# Altium PCB SBM_BMS.PcbDoc
Units mm, origin at the board's own origin, x right, y up, seen from the top; angles counter-clockwise.
Board outline 191.45 x 73.02 mm, 2 copper layers (Top Layer, Bottom Layer); 66 components, 48 nets, 222 pads, 87 vias.
Unrouted connection lines stored in the file: 9.
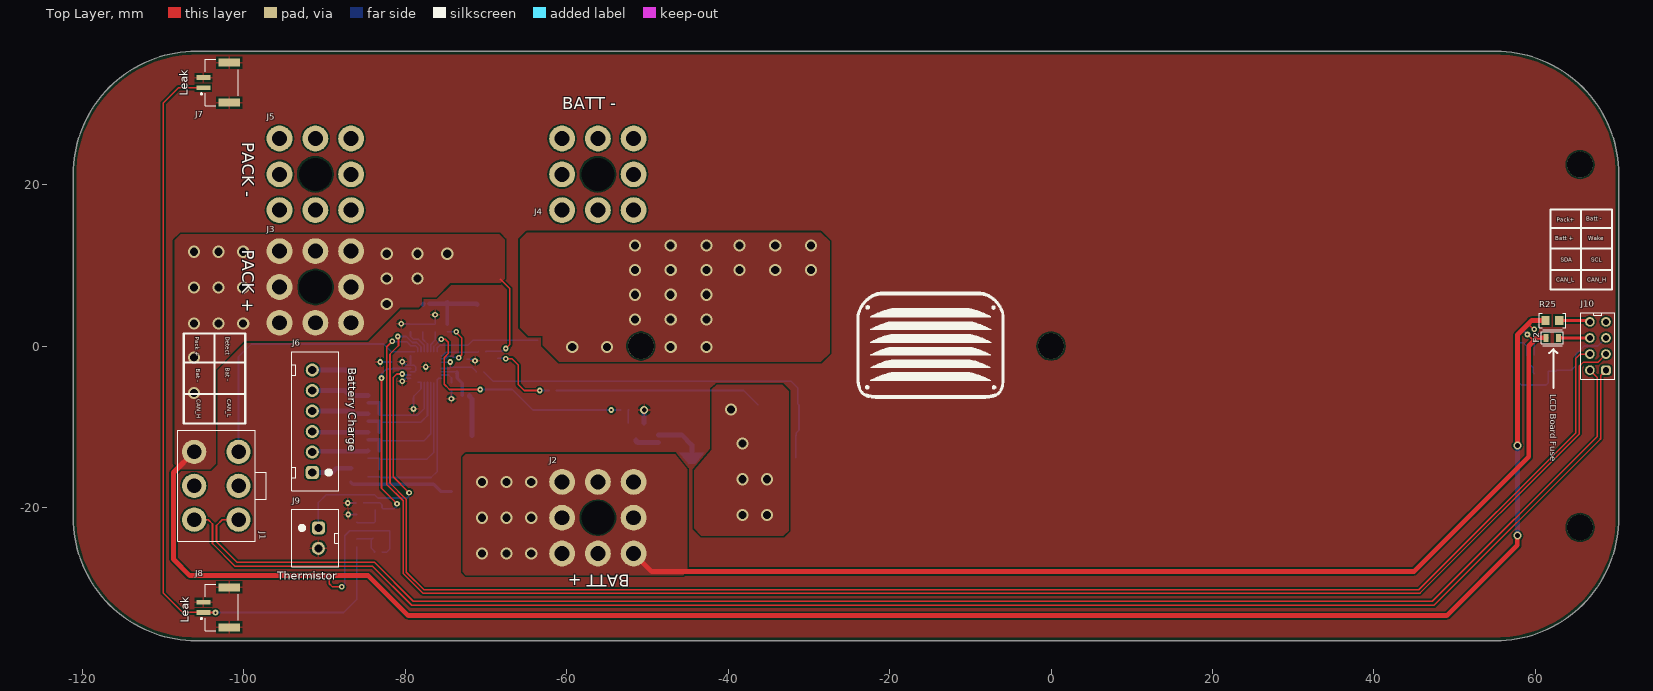
[diagram p0: Top Layer view]
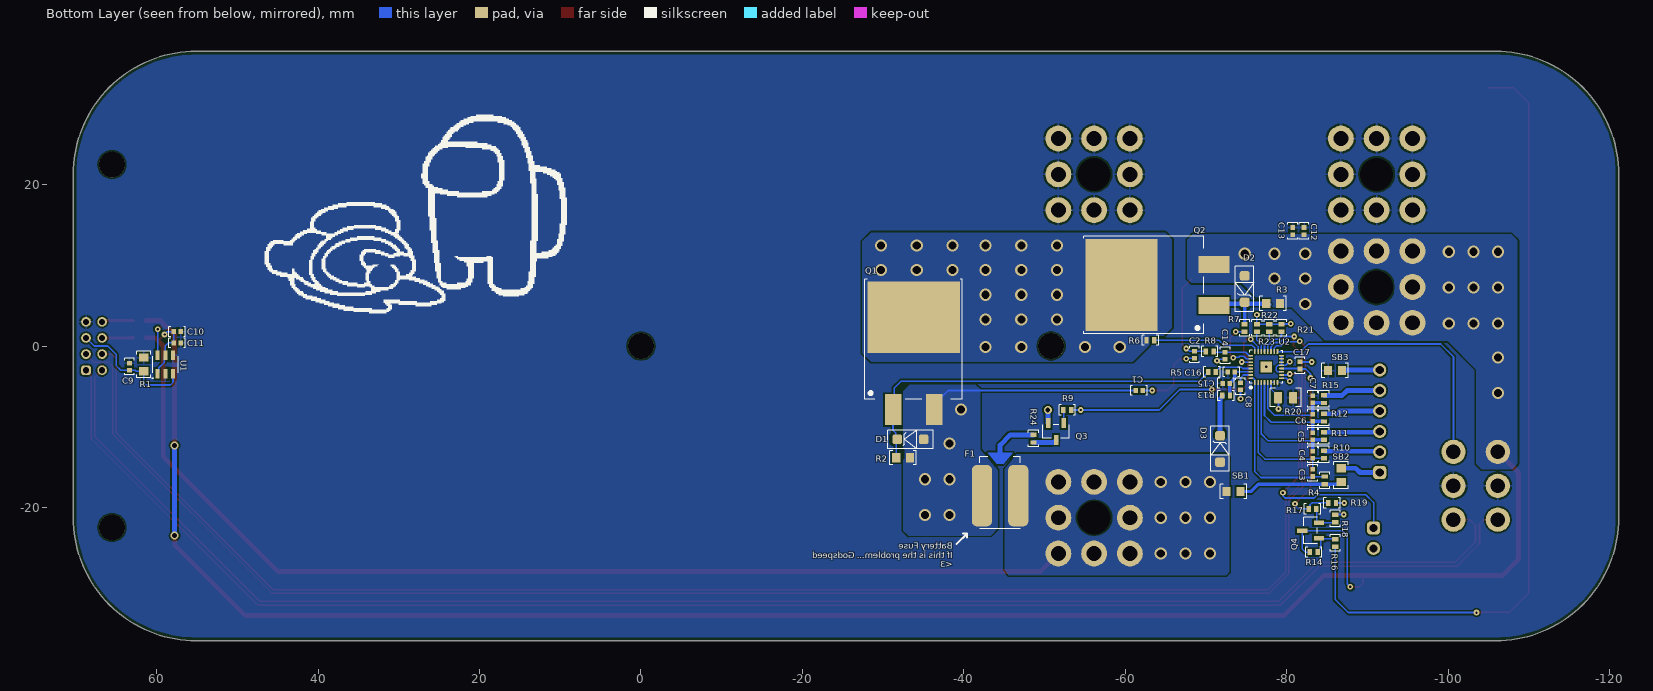
[diagram p1: Bottom Layer view, seen from below]
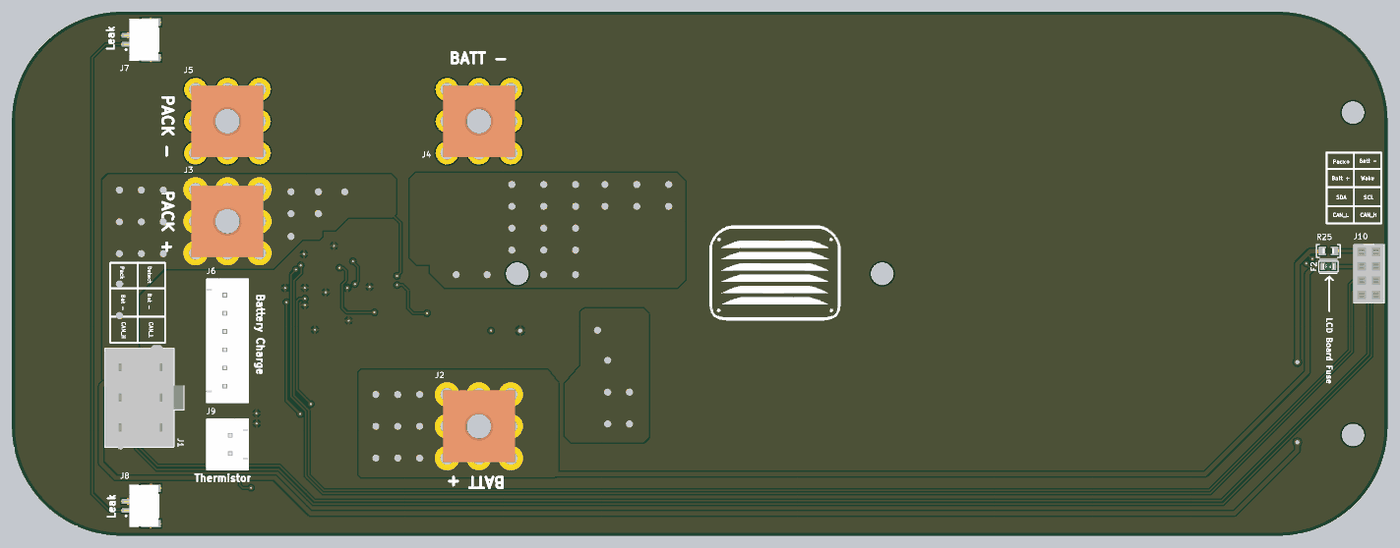
[diagram p2: 3D render of the assembled board from above, using the file's embedded part models]
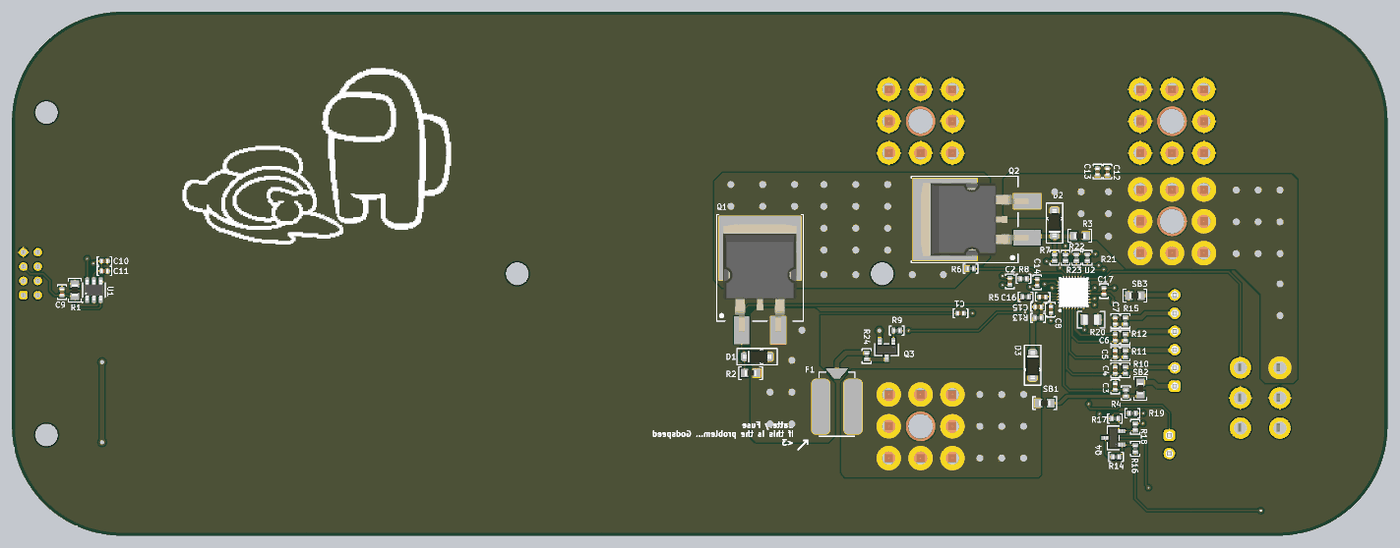
[diagram p3: 3D render of the assembled board from below, using the file's embedded part models]

## Layer stack, top to bottom
Top Solder: solder mask 0.0102, Solder Resist, Dk 3.5
Top Layer: signal copper 0.07
Dielectric 1: dielectric 0.32, FR-4, Dk 4.8
Bottom Layer: signal copper 0.07
Bottom Solder: solder mask 0.0102, Solder Resist, Dk 3.5

## Board outline
-105.887,-36.513 cw(c-105.887,-21.273) -121.127,-21.273 -121.127,21.272 cw(c-105.887,21.272) -105.887,36.512 55.088,36.512 cw(c55.088,21.272) 70.328,21.272 70.328,-21.273 cw(c55.088,-21.273) 55.088,-36.513

## Design rules (kind name [scope] priority, off if disabled: settings)
AcuteAngle [All] p1: minimum=8.75000000000000E+0001 checktracksonly=FALSE
BoardOutlineClearance [All] p1: gap=0.406 ignorepadtopadclearanceinfootprint=FALSE
Clearance [All] p1: gap=0.2 ignorepadtopadclearanceinfootprint=FALSE except(0: Arc-Hole Track-Hole SMDPad-Hole THPad-Hole Via-Hole Fill-Hole Poly-Hole Region-Hole Text-Hole; 0.1: SMDPad-Text)
ComponentOrientations [All] p1: allowedrotations=32
DiffPairsRouting "USB 2.0" [InDifferentialPairClass('USB 2.0')] p1: maxlimit=0.102 minlimit=0.102 mostfreqgap=0.102 toplayer_minwidth=0.229 toplayer_maxwidth=0.229 toplayer_prefwidth=0.229 bottomlayer_minwidth=0.229 bottomlayer_maxwidth=0.229 bottomlayer_prefwidth=0.229 impedanceprofiledriven=TRUE maxuncoupledlength=12.7
DiffPairsRouting CAN [All] p2: maxlimit=0.247 minlimit=0.247 mostfreqgap=0.309 toplayer_minwidth=0.2 toplayer_maxwidth=0.2 toplayer_prefwidth=0.2 bottomlayer_minwidth=0.2 bottomlayer_maxwidth=0.2 bottomlayer_prefwidth=0.2 impedanceprofiledriven=TRUE impedanceprofileid={13A1EB72-50D0-425B-8BFB-CC73D0DF0FBE} impedanceprofilevalue=120.000000 maxuncoupledlength=12.7
FanoutControl Fanout_Default [All] p5: bgadir=Out bgaviamode=Centered fanoutstyle=Auto fanoutdirection=OutOnly viagrid=0.025 // Fanout_Default (Default Rule)
HoleSize "HoleSize JLCPCB" [All] p1: absolutevalues=TRUE maxlimit=6.223 minlimit=0.203 maxpercent=80.000 minpercent=20.000
HoleToHoleClearance "HoleToHoleClearance JLCPCB" [All] p1: gap=0.508 allowstackedmicrovias=TRUE
MinimumAnnularRing "MinimumAnnularRing JLCPCB" [All] p1: minimumring=0.152
MinimumSolderMaskSliver [All] p1 off: minsoldermaskwidth=0.254
PasteMaskExpansion [All] p1: expansion=0.025
PolygonConnect PolygonConnect_4 [All vs IsNamedPolygon('NETC1_2_L02_P012') Or IsNamedPolygon('NETQ1_3_L02_P003') Or IsNamedPolygon('PACK+_L02_P001') Or IsNamedPolygon('PACK+_L02_P002') Or IsNamedPolygon('PACK_IN+_L02_P000')] p1: connectstyle=Direct reliefconductorwidth=0.254 reliefentries=4 polygonreliefangle="90 Angle" airgapwidth=0.254
PolygonConnect PolygonConnect_3 [All vs IsNamedPolygon('NETC1_2_L01_P025') Or IsNamedPolygon('NETQ1_3_L01_P024') Or IsNamedPolygon('PACK+_L01_P022') Or IsNamedPolygon('PACK+_L01_P023') Or IsNamedPolygon('PACK_IN+_L01_P019')] p2: connectstyle=Direct reliefconductorwidth=0.254 reliefentries=4 polygonreliefangle="90 Angle" airgapwidth=0.254
PolygonConnect PolygonConnect_2 [All vs IsNamedPolygon('NETC1_2_L01_P025') Or IsNamedPolygon('NETQ1_3_L01_P024') Or IsNamedPolygon('PACK+_L01_P022') Or IsNamedPolygon('PACK+_L01_P023') Or IsNamedPolygon('PACK_IN+_L01_P019')] p3: thpad.connectstyle=Direct thpad.reliefconductorwidth=0.254 thpad.reliefentries=4 thpad.polygonreliefangle="90 Angle" thpad.airgapwidth=0.254 smdpad.connectstyle=Direct smdpad.reliefconductorwidth=0.254 smdpad.reliefentries=4 smdpad.polygonreliefangle="90 Angle" smdpad.airgapwidth=0.254 via.connectstyle=Relief via.reliefconductorwidth=0.254 via.reliefentries=4 via.polygonreliefangle="90 Angle" via.airgapwidth=0.254
PolygonConnect PolygonConnect_1 [All vs IsNamedPolygon('NETC1_2_L02_P012') Or IsNamedPolygon('NETQ1_3_L02_P003') Or IsNamedPolygon('PACK+_L02_P001') Or IsNamedPolygon('PACK+_L02_P002') Or IsNamedPolygon('PACK_IN+_L02_P000')] p4: thpad.connectstyle=Direct thpad.reliefconductorwidth=0.254 thpad.reliefentries=4 thpad.polygonreliefangle="90 Angle" thpad.airgapwidth=0.254 smdpad.connectstyle=Direct smdpad.reliefconductorwidth=0.254 smdpad.reliefentries=4 smdpad.polygonreliefangle="90 Angle" smdpad.airgapwidth=0.254 via.connectstyle=Relief via.reliefconductorwidth=0.254 via.reliefentries=4 via.polygonreliefangle="90 Angle" via.airgapwidth=0.254
PolygonConnect [All] p5: connectstyle=Relief reliefconductorwidth=0.254 reliefentries=4 polygonreliefangle="90 Angle" airgapwidth=0.254
RoutingVias "RoutingVias JLCPCB" [All] p1: holewidth=0.254 width=0.559 viastyle="Through Hole" minholewidth=0.203 minwidth=0.508 maxholewidth=0.711 maxwidth=1.016
SMDEntry [All] p1: side=TRUE corner=TRUE anyangle=TRUE
SMDToCorner [All] p1: distance=0
SMDToPlane [All] p1: distance=0
SilkToSilkClearance [All] p1: silktosilkclearance=0.025
SilkToSolderMaskClearance "SilkToSolderMaskClearance JLCPCB" [IsPad] p1: minsilkscreentomaskgap=0.152 clearancetoexposedcopper=TRUE
SolderMaskExpansion [All] p1: expansion=0.102 istentingtop=FALSE
UnRoutedNet [All] p1: checkbadconnections=TRUE
Width [All] p1: maxlimit=10 minlimit=0.2 preferedwidth=0.2
21 further rules are at their usual default settings.

## Classes and differential pairs
differential pair class D120: CAN
differential pair CAN: +CAN_H -CAN_L

## Components (designator, comment, footprint, x,y, rotation, side; value= is the part's Value field where it differs from the comment)
C1 "100nF Ceramic 25V" CAPACITOR_0402 -61.704,-5.512 r0 bottom value=0.1uF
C2 "100nF Ceramic 25V" CAPACITOR_0402 -68.562,-1.067 r270 bottom value=0.1uF
C3 "100nF Ceramic 25V" CAPACITOR_0402 -83.228,-15.731 r90 bottom value=0.1uF
C4 "100nF Ceramic 25V" CAPACITOR_0402 -83.228,-13.445 r90 bottom value=0.1uF
C5 "100nF Ceramic 25V" CAPACITOR_0402 -83.228,-11.159 r90 bottom value=0.1uF
C6 "100nF Ceramic 25V" CAPACITOR_0402 -83.228,-8.873 r90 bottom value=0.1uF
C7 "100nF Ceramic 25V" CAPACITOR_0402 -83.228,-6.587 r90 bottom value=0.1uF
C8 "2.2uF Ceramic 35V" CAPACITOR_0402 -74.277,-5.004 r90 bottom value=2.2uF
C9 "100nF Ceramic 25V" CAPACITOR_0402 63.373,-2.559 r90 bottom value=0.1uF
C10 "1uF Ceramic 16V" CAPACITOR_0402 57.458,1.778 r180 bottom value=1uF
C11 "100nF Ceramic 25V" CAPACITOR_0402 57.458,0.381 r180 bottom value=0.1uF
C12 "1uF Ceramic 16V" CAPACITOR_0402 -82.151,14.246 r90 bottom value=1uF
C13 "100nF Ceramic 25V" CAPACITOR_0402 -80.754,14.246 r90 bottom value=0.1uF
C14 "1uF Ceramic 16V" CAPACITOR_0402 -72.372,-1.194 r270 bottom value=1uF
C15 "100nF Ceramic 25V" CAPACITOR_0402 -72.499,-4.623 r180 bottom value=0.1uF
C16 "1uF Ceramic 16V" CAPACITOR_0402 -73.134,-3.226 r180 bottom value=1uF
C17 "1uF Ceramic 16V" CAPACITOR_0402 -81.661,-2.413 r90 bottom value=1uF
D1 "Zener_Diode_16V_500mW" SOD-123 -33.385,-11.557 r0 bottom
D2 "Zener_Diode_16V_500mW" SOD-123 -74.785,7.061 r270 bottom
D3 "MBR0520LT3G" SOD-123 -71.737,-12.751 r90 bottom
F1 "ITV9550L2045MR" ITV9550 -44.486,-16.257 r270 bottom
F2 "Fuse 1A 32V 0603" "2-SMD Fuse 0603" 62.103,1.016 r0 top
J1 "Mini-Fit Jr VERT" "CONN_MOLEX_MINIFIT JR_6 POS_VERT" -103.404,-17.314 r90 top
J2 "Redcube M4 Term 85A" "Redcube M4 Term 85A" -56.14,-21.273 r0 top
J3 "Redcube M4 Term 85A" "Redcube M4 Term 85A" -91.14,7.315 r0 top
J4 "Redcube M4 Term 85A" "Redcube M4 Term 85A" -56.14,21.272 r0 top
J5 "Redcube M4 Term 85A" "Redcube M4 Term 85A" -91.14,21.272 r0 top
J6 "XH2.54 VERT" CONN_JST_XH254_6POS_VERT -91.521,-15.672 r90 top
J7 "JST GH VERT" CONN_JST_SM02B-GHS-TB(LF)(SN) -105,32 r90 top
J8 "JST GH VERT" CONN_JST_SM02B-GHS-TB(LF)(SN) -105,-33 r90 top
J9 "XH2.54 VERT" CONN_JST_XH254_2POS_VERT -90.759,-22.53 r270 top
J10 "Mini-Fit Jr R/A" Molex_Mili-Grid_2x4PIN_2.00MM_VERT 67.746,0 r90 top
Q1 "MOSFET N-Ch 80V 100A D2PAK" D2PAK -33.782,-2.159 r180 bottom
Q2 "MOSFET N-Ch 80V 100A D2PAK" D2PAK -65.26,7.569 r90 bottom
Q3 "MOSFET N-CH 30V 5.8A SOT-23-3" SOT-23-3 -51.417,-10.592 r0 bottom
Q4 "PNP 60V 600mA SOT23" SOT-23-3 -82.961,-22.876 r90 bottom
R1 "1M" RESISTOR_0603 61.595,-2.286 r90 bottom
R2 "1M" RESISTOR_0603 -32.474,-13.843 r0 bottom
R3 "1M" RESISTOR_0603 -78.303,5.283 r0 bottom
R4 "100 Ohm 5% 1/16W" RESISTOR_0402 -84.709,-16.637 r270 bottom
R5 "1k Ohm 1% 1/16W" RESISTOR_0402 -70.754,-3.226 r180 bottom
R6 "100 Ohm 5% 1/16W" RESISTOR_0402 -63.101,0.711 r180 bottom
R7 "1k Ohm 1% 1/16W" RESISTOR_0402 -74.785,2.235 r270 bottom
R8 "10k Ohm 1% 1/16W" RESISTOR_0402 -70.467,-0.686 r180 bottom
R9 "100 Ohm 5% 1/16W" RESISTOR_0402 -52.814,-7.925 r0 bottom
R10 "100 Ohm 5% 1/16W" RESISTOR_0402 -84.625,-13.445 r90 bottom
R11 "100 Ohm 5% 1/16W" RESISTOR_0402 -84.625,-11.159 r90 bottom
R12 "100 Ohm 5% 1/16W" RESISTOR_0402 -84.625,-8.873 r90 bottom
R13 "100 Ohm 5% 1/16W" RESISTOR_0402 -72.499,-6.147 r0 bottom
R14 "20k Ohm 1% 1/16W" RESISTOR_0402 -83.342,-25.543 r180 bottom
R15 "100 Ohm 5% 1/16W" RESISTOR_0402 -84.625,-6.587 r90 bottom
R16 "1k Ohm 1% 1/16W" RESISTOR_0402 -86.009,-24.4 r270 bottom
R17 "20k Ohm 1% 1/16W" RESISTOR_0402 -83.185,-20.193 r180 bottom
R18 "1k Ohm 1% 1/16W" RESISTOR_0402 -86.009,-21.352 r90 bottom
R19 "2k Ohm 1% 1/16W" RESISTOR_0402 -85.628,-19.447 r180 bottom
R20 "1.2k Ohm 5% 1/8W" RESISTOR_0805 -79.865,-6.401 r0 bottom
R21 "20k Ohm 1% 1/16W" RESISTOR_0402 -79.357,2.235 r90 bottom
R22 "20k Ohm 1% 1/16W" RESISTOR_0402 -77.833,2.235 r90 bottom
R23 "20k Ohm 1% 1/16W" RESISTOR_0402 -76.309,2.235 r90 bottom
R24 "100 Ohm 5% 1/16W" RESISTOR_0402 -48.623,-11.481 r270 bottom
R25 "10k Ohm 5% 1/10W" RESISTOR_0603 62.103,3.175 r0 top
SB1 "0 Ohm Jumper No Fit" RESISTOR_0603 -73.406,-18.034 r180 bottom
SB2 "0 Ohm Jumper No Fit" RESISTOR_0603 -86.741,-16.002 r90 bottom
SB3 "0 Ohm Jumper No Fit" RESISTOR_0603 -85.979,-3.048 r180 bottom
U1 "Analog Switch SPST-NO" TSOT-23_S6 58.928,-2.286 r90 bottom
U2 "Battery Managment IC" VQFN-32 -77.452,-2.591 r90 bottom

## Footprints (in the part's own frame and the unit in brackets; to place one, negate y for a bottom-side part, rotate by r counter-clockwise, add the part's x,y. Pads: shape width x height; smd on the part's side, far side on the other; paste and mask are expansions set on the pad)
"2-SMD Fuse 0603" [mm] "0603 Fuse Footprint"
  rect 0.65x1 smd paste+0 mask+0: 1(-0.775,0) 2(0.775,0)
  silkscreen extent -1.35,-1 1.35,1, body extent -0.8,-0.4 0.8,0.4, height 0.64
CAPACITOR_0402 [mm]
  rect 0.56x0.6 smd: 1(-0.435,0) 2(0.435,0)
  silkscreen extent -1.02,-0.6 1.02,0.6, body extent -0.5,-0.28 0.5,0.27, height 0.51
CONN_JST_SM02B-GHS-TB(LF)(SN) [mm] "JST GH Pitch 2 Pos R/A"
  rect 0.6x1.7 smd: 1(0,0) 2(1.25,0)
  rect 1x2.7 smd: S1(-1.85,-3.2) S2(3.1,-3.2)
  silkscreen extent -2.25,-4.3 3.5,0.35, body extent -2.25,-4.28 3.5,0.58, height 4.26
CONN_JST_XH254_2POS_VERT [mm] "JST XH 2.54mm Pitch 2 Pos Vertical"
  rrect50% 1.62x1.62 hole 1.02: 1(0,0)
  round 1.62 hole 1.02: 2(2.54,0)
  silkscreen extent -2.29,-3.3 4.83,2.54, body extent -2.34,-3.35 4.88,2.49, height 7.21
CONN_JST_XH254_6POS_VERT [mm] "JST XH 2.54mm Pitch 6 Pos Vertical"
  rrect50% 1.62x1.62 hole 1.02: 1(0,0)
  round 1.62 hole 1.02: 2(2.54,0) 3(5.08,0) 4(7.62,0) 5(10.16,0) 6(12.7,0)
  silkscreen extent -2.29,-3.3 14.99,2.54, body extent -2.34,-3.35 15.04,2.49, height 7.21
"CONN_MOLEX_MINIFIT JR_6 POS_VERT" [mm] "Molex Minifit Jr 5566 6 Pos VERT"
  round 3 hole 1.8: 1(-4.2,2.75) 2(0,2.75) 4(-4.2,-2.75) 5(0,-2.75)
  round 3 hole 1.801: 3(4.2,2.75) 6(4.2,-2.75)
  silkscreen extent -6.9,-6.2 6.9,4.8, body extent -7.23,-6.17 7.37,4.83, height 12.81
D2PAK [mil] "D2PAK (TO-263-3)"
  rect 82x150 smd: 1(-100,-225) 2(100,-225)
  rect 450x350 smd: 3(0,225)
  silkscreen extent -238,-175 238,410, body extent -201,-234 201,357, height 178
ITV9550 [mm] "Littlefuse ITV9550"
  rrect50% 7.6x2.5 smd: 1(2.285,-2.25) 2(2.285,2.25)
  round 0.025 smd: 3(-2.285,0)
  Top Layer region: -3.049,-1.536 -3.035,-1.55 -1.642,-0.381 -1.641,-0.381 -1.641,0.369 -1.635,0.375 -3.035,1.55 -3.035,0.395 -3.049,0.381 -3.043,0.375 -3.042,0.375 -3.042,-0.374 -3.049,-0.381
  silkscreen extent -2.54,-2.5 6.4,2.5
Molex_Mili-Grid_2x4PIN_2.00MM_VERT [mm] "Molex Mili-Grid 2.00mm 2x4 Vert"
  rrect50% 1.2x1.2 hole 0.75: 1(-3,-1)
  round 1.2 hole 0.75: 2(-3,1) 3(-1,-1) 4(-1,1) 5(1,-1) 6(1,1) 7(3,-1) 8(3,1)
  silkscreen extent -4.1,-2.09 4.1,2.09, body extent -4.05,-2.08 4.14,2.11, height 4.45
"Redcube M4 Term 85A" [mm]
  round 3.2 hole 1.85: 1(-4.435,-4.435) 1(-4.435,0) 1(-4.435,4.435) 1(0,-4.435) 1(0,4.435) 1(4.435,-4.435) 1(4.435,0) 1(4.435,4.435)
  round 3.2 hole 4.1 unplated: 8(0,0)
  body extent -5,-5 5,5, height 3
RESISTOR_0402 [mm] "Resistor 0402"
  rect 0.55x0.75 smd: 1(-0.475,0) 2(0.475,0)
  silkscreen extent -1.02,-0.64 1.02,0.64, body extent -0.5,-0.25 0.5,0.25, height 0.25
RESISTOR_0603 [mil] "Resistor 0603"
  rect 40x45 smd: 1(-33.5,0) 2(33.5,0)
  silkscreen extent -65,-35 65,35, body extent -31,-16 31,16, height 16
RESISTOR_0805 [mm]
  rrect25% 1x1.42 smd: 1(-0.935,0) 2(0.935,0)
  silkscreen extent -1.91,-1.14 1.91,1.14, body extent -1.11,-0.67 1.1,0.67, height 0.61
SOD-123 [mm] "Schottky Diode SOD-123"
  rrect50% 1.2x1.22 smd: 1(-1.635,0) 2(1.635,0)
  silkscreen extent -2.79,-1.14 2.79,1.14, body extent -1.95,-0.9 1.95,0.9, height 1.18
SOT-23-3 [mil]
  rect 22x50 smd paste+0 mask+4: 1(-37.5,-41) 2(37.5,-41) 3(0,41)
  silkscreen extent -65,-32 65,32, body extent -60,-52 60,52, height 44
TSOT-23_S6 [mil]
  rect 48x20 smd: 1(-45,37.4) 2(-45,0) 3(-45,-37.4) 4(45,-37.4) 5(45,0) 6(45,37.4)
  silkscreen extent -69,-62 40,65, body extent -55,-57 55,57, height 39
VQFN-32 [mm] "32 pin VQFN package, 4x4mm, 0.4mm pitch"
  rrect50% 0.6x0.2 smd: 1(-1.915,1.4) 2(-1.915,1) 3(-1.915,0.6) 4(-1.915,0.2) 5(-1.915,-0.2) 6(-1.915,-0.6) 7(-1.915,-1) 8(-1.915,-1.4) 17(1.915,-1.4) 18(1.915,-1) 19(1.915,-0.6) 20(1.915,-0.2) 21(1.915,0.2) 22(1.915,0.6) 23(1.915,1) 24(1.915,1.4)
  rrect50% 0.2x0.6 smd: 9(-1.4,-1.915) 10(-1,-1.915) 11(-0.6,-1.915) 12(-0.2,-1.915) 13(0.2,-1.915) 14(0.6,-1.915) 15(1,-1.915) 16(1.4,-1.915) 25(1.4,1.915) 26(1,1.915) 27(0.6,1.915) 28(0.2,1.915) 29(-0.2,1.915) 30(-0.6,1.915) 31(-1,1.915) 32(-1.4,1.915)
  rect 1.4x1.4 smd: 33(0,0)
  silkscreen extent -2.67,-2.03 2.05,2.03, body extent -2.01,-2.01 2.01,2.01, height 0.86

## Part data
C1 C2 C3 C4 C5 C6 C7 C9 C11 C13 C15: library part CAPACITOR_0.1uF_0402, "Cap 100nF 25V +/-10% / Ceramic 0402", Supplier Part Number 1=478-7868-1-ND, Tolerance="+/- 10%", Voltage=25V, Made By="Robert Pafford", Supplier 1=Digi-Key
C8: library part CAPACITOR_2.2uF_0402, "Cap 2.2uF 35V +/-10% / Ceramic 0402", Supplier Part Number 1=445-9028-1-ND, Tolerance="+/- 10%", Voltage=35V, Made By="Flip B", Supplier 1=Digi-Key
C10 C12 C14 C16 C17: library part CAPACITOR_1uF_0402, "Cap 1uF 16V +/-10% / Ceramic 0402", Supplier Part Number 1=478-0402YD105KAT4ADKR-ND, Tolerance="+/- 10%", Voltage=16V, Made By="Robert Pafford", Supplier 1=Digi-Key
D1 D2: "Zener Diode", Package=SOD-123, Power=500mW, Supplier Part Number 1=3757-MMSZ5246A_R1_00001CT-ND, Voltage - Zener=16V, ComponentLink1Description=Datasheet, ComponentLink1URL=https://www.panjit.com.tw/upload/datasheet/MMSZ5229A_SERIES.pdf, Made By="Flip B", Supplier 1=Digi-Key
D3: library part SCHOTTKY_20V_500mA, "Schottky Diode, 20V reverse breakdown, 500mA, Vf = 0.385V", Forward Current=500mA, Forward Voltage=0.385V, Package=SOD-123, Supplier Part Number 1=MBR0520LT3GOSCT-ND, ComponentLink1Description=Datasheet, ComponentLink1URL=https://www.onsemi.com/pdf/datasheet/mbr0520lt1-d.pdf, Made By="Flip B", Supplier 1=Digi-Key
F1: "LittelFuse", Breaking Capacity=120A, Current Rating=45A, Mfr_Name="Littelfuse Inc", Package=Proprietary, Voltage Rating=85V, Created By="Flip B", Manufacturer_Part_Number=ITV9550L2045MR, Response Time=">1min for 2x45A"
F2: library part ERB-RE1R00V, "Pansonic", Breaking Capacity=150A, Current Rating=1A, Mfr_Name=Panasonic, Package=1206, Supplier Part Number 1=P15124CT-ND, Voltage Rating=32V, Created By="Nathan Ayer", Manufacturer_Part_Number=ERB-RE1R00V, Response Time="Fast Blow", Supplier 1=Digi-Key
J1: library part "CONN_MOLEX_MINIFIT JR_6POS_VERT", "Molex Minifit Jr. 5566  / 6 Pos VERT Natural", Color=Natural, Current Per Pin=13A, Manufacturer=Molex, Supplier Part Number 1=WM3822-ND, ComponentLink1Description=Datasheet, ComponentLink1URL=https://www.molex.com/pdm_docs/sd/039290063_sd.pdf, Configuration=Vertical, Created By="Flip B", Number of Positions=8, Pitch=4.2mm, Series="Minifit Jr 5569", Supplier 1=Digi-Key
J2 J3 J4 J5: Current Rating="85 A", Created By="Nahtan Ayer", Screw Size=M4
J6: library part CONN_JST_XH254_6POS_VERT, "JST XH 2.54mm Pitch 6 Pos Vertical", Color=White, Current Per Pin=4A, Manufacturer=JST, Supplier Part Number 1=455-2264-1-ND, Configuration=Vertical, Created By="Flip B", NOTE="Do not use JST 2.5mm parts with this footprint. JST does not make 2.54mm pitch pins, rather only clones make this connector!", Number of Positions=6, Pitch=2.54mm, Series="XH 2.54", Supplier 1=Digi-Key
J7 J8: library part CONN_JST_GH_POS_VERT, "JST GH Pitch 2 Pos Vertical", Color=Natural, Current Per Pin=1A, Manufacturer=JST, Supplier Part Number 1=455-1580-1-ND, Configuration=Vertical, Created By="Robert P", Number of Positions=4, Pitch=1.25mm, Series=GH, Supplier 1=Digi-Key
J9: library part CONN_JST_XH254_2POS_VERT, "JST XH 2.54mm Pitch 2 Pos Vertical", Color=White, Current Per Pin=4A, Manufacturer=JST, ComponentLink1Description="Purchase Link", ComponentLink1URL=https://www.amazon.com/460PCS-XH2-54-Connector-Terminal-Connectors/dp/B09DBGVX5C, Configuration=Vertical, Created By="Robert P", NOTE="Do not use JST 2.5mm parts with this footprint. JST does not make 2.54mm pitch pins, rather only clones make this connector!", Number of Positions=2, Pitch=2.54mm, Series="XH 2.54"
J10: library part CONN_MOLEX_MiliGrid_8POS, "Molex Mili-Grid 2.00mm pitch 8 Pos Vertical", Color=Black, Current Per Pin=1A, Manufacturer=Molex, Supplier Part Number 1=WM18675-ND, ComponentLink1Description=Datasheet, ComponentLink1URL=https://www.molex.com/pdm_docs/sd/791077003_sd.pdf, Configuration=Vertical, Created By="Flip B", Number of Positions=8, Pitch=2.00mm, Series=Mili-Grid, Supplier 1=Digi-Key
Q1 Q2: library part PSMN4R4-80BS,118, "N-Channel 80V 100A (Ta) 306W (Ta), Surface Mount D2PAK", Amp Rating=100A, Package=D2PAK, Power Dissipation=306W, Supplier Part Number 1=1727-7123-1-ND, Created By="Flip B", FET Type=N-Channel, Manufacturer _Part_Number=PSMN4R4-80BS,118, Rds (on)="3.8mOhm @ 25A, 10Vgs", Supplier 1=Digi-Key, Vdss="80 V", Vendor="Nexperia USA Inc.", Vgs (Max)="+/- 20 V", Vgs (th)=3V
Q3: library part AO3404A, "N-Channel 30 V 5.8A (Ta) 1.4W (Ta) Surface Mount SOT-23-3", Amp Rating="5.8 A", Package=SOT23-3L, Power Dissipation="1.4W (Ta)", Supplier Part Number 1=785-1004-1-ND, Created By="Dylan T", FET Type=N-Channel, Manufacturer _Part_Number=AO3404A, Rds (on)="28mOhm @ 5.8A, 10V", SourceLibrary=ON_Semiconductor_2020-01-13, Supplier 1=Digi-Key, Vdss=30V, Vendor="Alpha & Omega Semiconductor Inc.", Vgs (Max)="3V @ 5.8A, 10V", Vgs (th)="3V @ 250µA"
Q4: library part MMBT2907A-7-F, "PNP 60 V 600mA Surface Mount SOT-23", Amp Rating=600mA, Package="TO-236-3, SC-59, SOT-23-3", Power Dissipation="1.56W (Tc)", Supplier Part Number 1=MMBT2907A-FDICT-ND, BJT Type=PNP, ComponentLink1Description=Datasheet, ComponentLink1URL=https://media.digikey.com/pdf/Data%20Sheets/Diodes%20PDFs/MMBT2907A_Rev2016.pdf, Created By="Robert Pafford", Manufacturer_Part_Number=MMBT2907A-7-F, Rds (on)="50mOhm @ 3A, 4.5V", Supplier 1=Digi-Key, Vdss="20 V", Vendor=Digikey, Vgs (Max)=±10V, Vgs (th)="800mV @ 250µA"
R1 R2 R3: library part RESISTOR_1M_0603, "RES 1M OHM 1/8W 0603", Digikey Part Numer=CR0603-JW-104ELFTR-ND, Supplier Part Number 1=RMCF0603JT1M00CT-ND, Tolerance="+/- 5%", ComponentLink1Description=Datasheet, ComponentLink1URL=https://www.bourns.com/docs/product-datasheets/CRxxxxx.pdf, Made By="Robert Pafford", Supplier=Digikey, Supplier 1=Digi-Key, Value  (Ohms)=1M, Wattage=1/8W
R4 R6 R9 R10 R11 R12 R13 R15 R24: library part RESISTOR_100_0402, "RES 100 OHM 5% 1/16W 0402", Digikey Part Numer=311-100JRTR-ND, Supplier Part Number 1=311-100JRCT-ND, Tolerance="+/- 5%", Value  (Ohms)=100, Made By="Flip B", Supplier=Digikey, Supplier 1=Digi-Key, Wattage=1/16W
R5 R7 R16 R18: library part RESISTOR_1K_0402, "RES 1k OHM 1% 1/16W 0402", Digikey Part Numer=CR0603-JW-104ELFTR-ND, Supplier Part Number 1=13-AC0402FR-131KLCT-ND, Tolerance="+/- 1%", Value  (Ohms)=1K, Made By="Robert Pafford", Supplier=Digikey, Supplier 1=Digi-Key, Wattage=1/16W
R8: library part RESISTOR_10K_0402, "RES 10k OHM 1% 1/16W 0402", Digikey Part Numer=CR0603-JW-104ELFTR-ND, Supplier Part Number 1=YAG3436CT-ND, Tolerance="+/- 1%", Value  (Ohms)=10K, Made By="Robert Pafford", Supplier=Digikey, Supplier 1=Digi-Key, Wattage=1/16W
R14 R17 R21 R22 R23: library part RESISTOR_20K_0402, "RES 20k OHM 1% 1/16W 0402", Supplier Part Number 1=311-20.0KLRCT-ND, Tolerance="+/- 1%", Value  (Ohms)=20k, Made By="Flip B", Supplier 1=Digi-Key, Wattage=1/16W
R19: library part RESISTOR_2K_0402, "RES 2k OHM 1% 1/16W 0402", Supplier Part Number 1=311-2KLRCT-ND, Tolerance="+/- 1%", Value  (Ohms)=2K, Made By="Flip B", Supplier 1=Digi-Key, Wattage=1/16W
R20: library part RESISTOR_1m_0805, "RES 1m OHM 1% 1W 0805", Supplier Part Number 1=738-CSSH0805FT1L00CT-ND, Tolerance="+/- 1%", Value  (Ohms)=1m, ComponentLink1Description=Datasheet, ComponentLink1URL=https://www.bourns.com/docs/product-datasheets/CRxxxxx.pdf, Made By="Flip B", Supplier 1=Digi-Key, Wattage=1W
R25: library part RESISTOR_10K_0603, "RES 10k OHM 5% 1/10W 0603", Digikey Part Numer=CR0603-JW-104ELFTR-ND, Supplier Part Number 1=2019-RK73B1JTTD103JCT-ND, Tolerance="+/- 5%", Value  (Ohms)=10K, ComponentLink1Description=Datasheet, ComponentLink1URL=https://www.bourns.com/docs/product-datasheets/CRxxxxx.pdf, Made By="Robert Pafford", Supplier=Digikey, Supplier 1=Digi-Key, Wattage=1/8W
SB1 SB2 SB3: library part JUMPER_0_0603, "0 Ohm Jumper No Fit for Solder Bridge", Value  (Ohms)=0, ComponentLink1Description=Digikey, ComponentLink1URL=https://www.digikey.com/en/products/detail/koa-speer-electronics-inc/RK73B1JTTD101J/9844701, Made By="Robert Pafford"
U1: library part MAX4520EUT+T, "Analog Switch SPST Normally Open", On resistance=160Ohm, Package="SOT-23-6 Analog Devices", Supplier Part Number 1=MAX4520EUT+TCT-ND, Voltage=9-36V, Circuit=SPST, ComponentLink1Description=Datasheet, ComponentLink1URL=https://www.analog.com/media/en/technical-documentation/data-sheets/max4510-max4520.pdf, Created By="Flip B", MF="Analog Devices", Supplier 1=Digi-Key
U2: library part BQ40Z80RSMT, "Multifuntion Li-ion/ Lipo Battery Pack Managment IC", Manufacturer="Texas Instruments", Quiescent Current=50mA, Supplier Part Number 1=296-BQ40Z80RSMTCT-ND, Supply Voltage="2.2V - 32V", ComponentLink1Description=Datasheet, ComponentLink1URL=https://www.ti.com/lit/ds/symlink/bq40z80.pdf?HQS=dis-dk-null-digikeymode-dsf-pf-null-wwe&ts=1672534896638&ref_url=https%253A%252F%252Fwww.ti.com%252Fgeneral%252Fdocs%252Fsuppproductinfo.tsp%253FdistId%253D10%2526gotoUrl%253Dhttps%253A%252F%252Fwww.ti.com%252Flit%252Fgpn%252Fbq40z80, Created By="Flip B", No. Of Cells=2S-6S, PartNumber=BQ40Z80RSMT, Supplier 1=Digi-Key

## Free pads (board coordinates)
  round 3.2 hole 3.2 unplated: 10(-50.8,0) 10(0,0)
  round 3.175 hole 3.175 unplated: 10(65.532,-22.479) 10(65.532,22.479)

## Via types
v1: diameter 1.5, hole 1, Top Layer to Bottom Layer, tented both sides, 54 vias
v2: diameter 0.7, hole 0.3, Top Layer to Bottom Layer, tented both sides, 30 vias
v3: diameter 1, hole 0.6, Top Layer to Bottom Layer, tented both sides, 3 vias

## Nets (pads, with @x,y where several pads share a name; then routed paths per layer and width w, separated by ;. In a path a pad name is that pad's centre, name@x,y a point inside that pad or via, vN(x,y) a via of type N, cw(c..) or ccw(c..) an arc to the next point about the centre after c; other vN are vias at no path point)
BAT+: F2.2 J10.6 | length 4.1
  Top Layer w0.4: F2.2 63.203,1.016 63.219,1 J10.6@67,1
BAT-: C7.2 C9.2 C10.2 C11.2 C12.2 C13.2 C15.1 C16.1 J1.2 J1.5 J4.1 J5.1 J10.7 R1.2 R20.1 SB3.1 U1.2 U1.4 U2.8
CAN_H: J1.1 J10.1 | length 197.4
  Top Layer w0.2: J1.1 -104.422,-21.514 -103.887,-22.049 -103.887,-24.468 -101.05,-27.305 -84.032,-27.305 -79.205,-32.132 47.455,-32.132 68.072,-11.515 68.072,-11.427 68.099,-11.4 68.099,-7.084 68.099,-3.647 J10.1
CAN_L: J1.4 J10.2 | length 196.2
  Top Layer w0.2: J1.4 -102.667,-21.514 -103.378,-22.225 -103.378,-24.257 -100.839,-26.796 -83.821,-26.796 -78.994,-31.623 47.244,-31.623 67.652,-11.215 67.652,-7.357 67.652,-3.906 J10.2
Detect: J1.6 U2.17 | length 34.6
  Bottom Layer w0.2: J1.6 -100.654,-1.34 -99.06,0.254 -82.677,0.254 -81.732,-0.691 U2.17@-78.852,-0.691
Leak: C17.1 R17.1 R19.1 U2.12 | length 25.8
  Top Layer w0.2: v2(-82.946,-3.971) -82.946,-17.638 v2(-81.026,-19.558)
  Bottom Layer w0.2: R19.1 -85.135,-19.43 -83.144,-19.43 -82.883,-19.691 -82.883,-20.02 R17.1 -82.693,-20.176 -81.39,-20.176 -81.122,-19.908 -81.122,-19.654 v2(-81.026,-19.558) ; v2(-82.946,-3.971) -82.946,-3.444 -82.35,-2.848 C17.1@-81.681,-2.848 ; C17.1 -81.604,-2.791 U2.12@-79.352,-2.791
NetC1_1: C1.1 C2.2 | length 9.5
  Top Layer w0.2: v2(-67.546,-1.575) -66.784,-1.575 -66.022,-2.337 -66.022,-4.75 -65.26,-5.512 v2(-63.355,-5.512)
  Bottom Layer w0.2: C2.2 -68.525,-1.539 -67.582,-1.539 v2(-67.546,-1.575) ; v2(-63.355,-5.512) C1.1
NetC1_2: C1.2 D1.1 F1.1 Q1.2 R2.1 | length 25.7
  Bottom Layer w0.2: C1.2 -38.082,-5.512 Q1.2@-36.304,-7.29
  other v1: -38.227,-20.945 -35.179,-20.945 -38.227,-16.51 -35.179,-16.51 -38.227,-12.075 -39.624,-7.874
NetC3_1: C3.1 R4.1 U2.1 U2.32 | length 20.9
  Bottom Layer w0.2: R4.1@-84.625,-16.206 -84.605,-16.186 -83.248,-16.186 C3.1 -83.101,-16.293 -76.803,-16.293 -76.052,-15.542 -76.052,-4.541 -76.052,-4.17 -75.873,-3.991 U2.32@-75.502,-3.991
NetC3_2: C3.2 C4.1 R10.1 U2.2 | length 18.6
  Bottom Layer w0.2: R10.1 -84.605,-13.9 -83.248,-13.9 C4.1@-83.228,-13.92 ; C3.2 C4.1@-83.228,-13.92 ; U2.2@-76.452,-4.541 -76.452,-13.148 -77.311,-14.007 -83.141,-14.007 C4.1@-83.228,-13.92
NetC4_2: C4.2 C5.1 R11.1 U2.3 | length 16
  Bottom Layer w0.2: C5.1 -83.101,-11.721 -77.692,-11.721 -76.852,-10.881 U2.3@-76.852,-4.491
  Bottom Layer w0.4: R11.1 -84.605,-11.614 -83.248,-11.614 C5.1 C4.2
NetC5_2: C5.2 C6.1 R12.1 U2.4 | length 13.3
  Bottom Layer w0.2: C6.1 -83.103,-9.433 -78.071,-9.433 -77.252,-8.614 -77.252,-4.886 U2.4@-77.252,-4.491
  Bottom Layer w0.4: R12.1 -84.605,-9.328 -83.248,-9.328 C6.1 C5.2
NetC6_2: C6.2 C7.1 R15.1 U2.5 | length 12
  Bottom Layer w0.2: C7.1@-83.248,-7.042 C7.1@-83.228,-7.042 ; C6.2 -83.101,-8.565 -78.473,-8.565 -77.652,-7.744 U2.5@-77.652,-4.491
  Bottom Layer w0.4: R15.1 -84.605,-7.042 C7.1@-83.248,-7.042 ; C6.2 C7.1@-83.228,-7.042
NetC8_2: C8.2 U2.31 | length 2
  Bottom Layer w0.2: U2.31@-75.502,-3.591 -74.641,-3.591 -74.277,-3.955 C8.2
NetC14_1: C14.1 R8.2 U2.25 | length 4.8
  Bottom Layer w0.2: U2.25@-75.552,-1.191 -75.352,-1.191 -74.92,-0.759 -71.015,-0.759 R8.2
NetC15_2: C15.2 C16.2 R13.1 U2.30 | length 5.3
  Bottom Layer w0.2: U2.30@-75.552,-3.191 C16.2@-73.604,-3.191
  Bottom Layer w0.4: C16.2@-73.604,-3.191 C16.2 -73.515,-3.28 -73.642,-3.407 -73.588,-3.407 -73.569,-3.426 -73.569,-3.968 -72.934,-4.603 C15.2 -72.954,-4.643 -72.954,-6.127 R13.1
NetD1_2: D1.2 Q1.1 R2.2 R5.1 | length 48.6
  Bottom Layer w0.2: R5.1 -69.136,-4.369 -32.207,-4.369 -31.374,-5.202 -31.374,-7.14 -31.224,-7.29 -31.224,-10.427 -31.561,-10.764 -31.561,-11.062 D1.2@-31.615,-11.116 ; R2.2 D1.2@-31.623,-11.116
NetD2_2: D2.2 Q2.1 R3.2 R7.1 | length 9
  Bottom Layer w0.4: R7.1 D2.2
  Bottom Layer w0.6: R3.2@-77.795,5.156 R3.2@-77.725,5.226 ; R3.2@-77.001,5.226 -74.985,5.226 D2.2 -74.585,5.226 -71.172,5.226 -71.074,5.128 Q2.1@-71.078,5.128
NetD3_2: D3.2 R13.2 | length 5.1
  Bottom Layer w0.6: R13.2 -72.024,-6.247 -71.737,-6.534 D3.2
NetF1_3: F1.3 R24.1 | length 6.4
  Bottom Layer w0.6: R24.1 -45.763,-11.006 -44.486,-12.283 -44.486,-13.222 F1.3
NetJ6_1: J6.1 SB2.2 | length 5
  Bottom Layer w0.6: J6.1 -89.08,-15.672 -88.559,-15.151 SB2.2
NetJ6_2: J6.2 R10.2 | length 7
  Bottom Layer w0.6: J6.2 -91.434,-13.045 -84.7,-13.045 R10.2
NetJ6_3: J6.3 R11.2 | length 6.9
  Bottom Layer w0.6: J6.3 -91.429,-10.684 R11.2
NetJ6_4: J6.4 R12.2 | length 7
  Bottom Layer w0.6: J6.4 -86.596,-8.052 -86.25,-8.398 R12.2
NetJ6_5: J6.5 R15.2 | length 7.1
  Bottom Layer w0.6: J6.5 -87.485,-5.512 -86.885,-6.112 R15.2
NetJ6_6: J6.6 SB3.2 | length 4.7
  Bottom Layer w0.6: J6.6 -87.414,-2.972 -87.338,-3.048 SB3.2
NetJ7_1: J7.1 J8.1 R16.2 | length 98.6
  Top Layer w0.2: J7.1 -108.081,32 -109.982,30.099 -109.982,-30.607 -107.589,-33 J8.1 -104.15,-33 -104.13,-33.02 v2(-103.505,-33.02)
  Bottom Layer w0.2: v2(-103.505,-33.02) -87.63,-33.02 -86.009,-31.399 R16.2
NetJ9_1: J9.1 U2.10 | length 33
  Top Layer w0.2: v2(-80.353,-3.469) -81.066,-3.469 -81.496,-3.899 -81.496,-16.194 v2(-79.529,-18.161)
  Bottom Layer w0.2: J9.1 -90.759,-19.385 -89.789,-18.415 -83.82,-18.415 -83.412,-18.823 -79.783,-18.823 -79.585,-18.625 -79.585,-18.217 v2(-79.529,-18.161) ; v2(-80.353,-3.469) -80.356,-3.472 -80.356,-3.591 U2.10@-79.352,-3.591
NetJ10_8: J10.8 R25.2 | length 4.2
  Top Layer w0.4: R25.2@62.878,3.175 J10.8@66.825,3.175 ; J10.8@66.571,3.175 J10.8
NetQ1_3: Q1.3 Q2.3 R6.1
  other v1: -59.309,-0.127 -54.991,-0.127 -47.117,-0.127 -42.682,-0.127 -51.552,3.302 -47.117,3.302 -42.682,3.302 -51.552,6.35 -47.117,6.35 -42.682,6.35 -51.552,9.398 -47.117,9.398 -42.682,9.398 -38.598,9.398 -34.163,9.398 -29.728,9.398 -51.552,12.446 -47.117,12.446 -42.682,12.446 -38.598,12.446 -34.163,12.446 -29.728,12.446
NetQ3_1: Q3.1 R9.2 | length 1.6
  Bottom Layer w0.2: Q3.1 -52.354,-9.535 -52.354,-7.94 R9.2
NetQ3_3: Q3.3 R24.2 | length 3
  Bottom Layer w0.6: Q3.3 -51.417,-11.777 -51.238,-11.956 R24.2
NetQ4_1: Q4.1 R14.2 R16.1 | length 3.9
  Bottom Layer w0.2: R16.1 -85.96,-23.877 Q4.1@-84.093,-23.877 ; Q4.1 -84.05,-23.877 Q4.1@-84.093,-23.877 ; R14.2 -83.817,-25.443 -84.225,-25.035 -84.225,-24.008 Q4.1@-84.093,-23.877
NetQ4_2: Q4.2 R17.2 R18.1 | length 3.8
  Bottom Layer w0.2: R18.1 -85.96,-21.875 -83.854,-21.875 -83.723,-21.744 R17.2@-83.723,-20.303
NetR4_2: R4.2 SB1.2 SB2.1 | length 13
  Bottom Layer w0.4: SB2.1 -86.482,-17.112 R4.2 -76.487,-17.112 -75.565,-18.034 SB1.2
NetR5_2: R5.2 U2.29 | length 4.7
  Bottom Layer w0.2: U2.29@-75.552,-2.791 -74.531,-2.791 -74.366,-2.626 -71.729,-2.626 -71.229,-3.126 R5.2
NetR6_2: R6.2 U2.24 | length 13.3
  Bottom Layer w0.2: U2.24@-76.052,-0.691 -76.052,-0.233 -75.743,0.076 -72.245,0.076 -71.61,0.711 R6.2
NetR7_2: R7.2 U2.26 | length 7.1
  Top Layer w0.2: v2(-73.675,1.76) -73.675,1.669 -73.007,1.001 -73.007,-1.067 v2(-73.388,-1.448)
  Bottom Layer w0.2: U2.26@-75.552,-1.591 -74.973,-1.591 -74.659,-1.277 -74.164,-1.277 -74.038,-1.403 -73.433,-1.403 v2(-73.388,-1.448) ; R7.2 v2(-73.675,1.76)
NetR9_1: R9.1 U2.23 | length 31.6
  Top Layer w0.2: v2(-75.547,0.838) -75.039,0.838 -74.658,0.457 -74.658,-0.94 -75.166,-1.448 -75.166,-4.75 -74.531,-5.385 v2(-70.69,-5.385)
  Bottom Layer w0.2: U2.23@-76.452,-0.686 -76.452,-0.067 v2(-75.547,0.838) ; v2(-70.69,-5.385) -66.751,-5.385 -64.211,-7.925 v2(-54.465,-7.925) R9.1
NetR21_1: R21.1 U2.20 | length 3.5
  Bottom Layer w0.2: R21.1 -79.357,1.219 -78.976,0.838 -78.399,0.838 -77.652,0.091 U2.20@-77.652,-0.686
NetR22_1: R22.1 U2.21 | length 2.7
  Bottom Layer w0.2: R22.1 -77.833,0.838 -77.252,0.257 U2.21@-77.252,-0.686
NetR23_1: R23.1 U2.22 | length 2.7
  Bottom Layer w0.2: U2.22@-76.852,-0.686 -76.852,0.168 -76.309,0.711 R23.1
Pack+: C2.1 C12.1 C13.1 D2.1 J1.3 J3.1 Q2.2 Q4.3 R3.1 R8.1 R14.1 R25.1 U1.6 | length 252.8
  Top Layer w0.2: -89.408,-28.448 -89.408,-29.464 -89.027,-29.845 v2(-87.884,-29.845) ; -68.199,8.255 -67.038,7.094 -67.038,0.203 v2(-67.546,-0.305) ; 59.119,2.731 59.751,2.098 v2(59.878,2.098) ; R25.1@60.753,3.108 R25.1@60.82,3.175 ; R25.1@60.82,3.04 61.193,3.04 R25.1@61.328,3.175
  Top Layer w0.6: J1.3 -108.712,-15.672 -108.712,-26.416 -106.68,-28.448 -89.408,-28.448 -84.582,-28.448 -79.629,-33.401 49.032,-33.401 57.766,-24.667 57.766,-23.514 v3(57.785,-23.495) ; v3(57.785,-12.319) 57.785,1.397 59.119,2.731 59.563,3.175 59.817,3.175 ; 59.878,3.175 R25.1@61.328,3.175
  Bottom Layer w0.2: v2(-87.884,-29.845) -87.503,-29.464 -87.503,-23.495 -86.884,-22.876 Q4.3 -81.919,-25.15 -82.296,-25.527 -82.85,-25.527 R14.1 ; R8.1 -69.938,-0.632 C2.1 -67.962,-0.632 -67.635,-0.305 v2(-67.546,-0.305) ; U1.6 v2(59.878,2.098)
  Bottom Layer w0.6: v3(57.785,-23.495) v3(57.785,-12.319)
  other v1: -106.172,-5.842 -106.172,-1.407 -106.172,2.804 -103.124,2.804 -100.076,2.804 -82.296,5.207 -106.172,7.239 -103.124,7.239 -100.076,7.239 -82.296,8.382 -78.486,8.382 -82.296,11.43 -78.486,11.43 -74.803,11.43 -106.172,11.674 -103.124,11.674 -100.076,11.674
Pack_in+: C10.1 C11.1 D3.1 F1.2 F2.1 J2.1 SB1.1 U1.1 U1.5 | length 142.7
  Top Layer w0.2: v2(59.021,1.431) 59.69,0.762 59.69,0.508
  Top Layer w0.6: J2.1@-51.705,-25.708 -49.473,-27.94 44.958,-27.94 59.182,-13.716 59.182,0 59.69,0.508 60.198,1.016 F2.1
  Bottom Layer w0.2: C11.1 C10.1 ; C11.1@57.966,0.381 58.547,0.381 58.928,0 U1.5 59.082,-1.297 59.082,-2.059 59.724,-2.701 59.724,-3.275 U1.1 ; C10.1@58.02,1.778 58.674,1.778 v2(59.021,1.431)
  other v1: -70.485,-25.708 -67.437,-25.708 -64.389,-25.708 -70.485,-21.273 -67.437,-21.273 -64.389,-21.273 -70.485,-16.838 -67.437,-16.838 -64.389,-16.838
RP2040_SCL: J10.3 U2.18 | length 201.2
  Top Layer w0.2: v2(-81.622,0.592) -82.296,-0.082 -82.296,-17.145 -80.264,-19.177 -80.264,-28.194 -77.851,-30.607 45.72,-30.607 65.424,-10.903 65.424,-2.521 65.913,-2.032 67.714,-2.032 68.515,-1.231 68.746,-1.231 J10.3
  Bottom Layer w0.2: v2(-81.622,0.592) -81.558,0.529 -79.798,0.529 -79.307,0.038 -78.736,0.038 -78.452,-0.246 U2.18@-78.452,-0.686
RP2040_SDA: J10.4 U2.19 | length 199.7
  Top Layer w0.2: v2@-81.035,1.274 v2(-80.939,1.179) -80.843,1.083 -80.843,0.056 -81.896,-0.997 -81.896,-16.979 -79.864,-19.011 -79.864,-28.028 -77.685,-30.207 45.554,-30.207 65.024,-10.737 65.024,-1.524 65.548,-1 J10.4
  Bottom Layer w0.2: v2(-80.939,1.179) -79.882,1.179 -79.142,0.438 -78.564,0.438 -78.052,-0.074 U2.19@-78.052,-0.686
VSS: C8.1 C14.2 C17.2 J7.2 J7.S1 J7.S2 J8.2 J8.S1 J8.S2 J9.2 Q3.2 R18.2 R19.2 R20.2 R21.2 R22.2 R23.2 U2.6 U2.7 U2.9 U2.11 U2.13 U2.14 U2.15 U2.16 U2.27 U2.33 | length 23.4
  Bottom Layer w0.2: v2(-87.106,-19.447) R19.2 ; v2(-87.073,-20.877) R18.2 ; v2(-83.112,-1.978) C17.2 ; v2(-80.5,2.743) -80.483,2.726 -79.373,2.726 R21.2 R22.2 R23.2 v2(-76.309,3.886) ; v2(-80.373,-4.369) -80.33,-4.369 -79.952,-3.991 U2.9@-79.352,-3.991 ; v2(-80.373,-1.956) -80.324,-1.956 -79.889,-2.391 U2.13@-79.352,-2.391 ; U2.11@-79.352,-3.191 -78.839,-3.191 -78.722,-3.074 -78.722,-2.581 -78.912,-2.391 U2.13@-79.352,-2.391 ; U2.16@-79.352,-1.191 -79.352,-1.591 -79.352,-1.991 U2.13@-79.352,-2.391 ; v2(-78.976,-7.798) -78.976,-6.447 R20.2 -78.93,-6.191 -78.052,-5.313 -78.052,-5.091 -78.052,-4.491 U2.7@-78.452,-4.491 ; U2.27@-75.552,-1.991 -74.454,-1.991 v2(-74.443,-1.981) ; v2(-74.277,-6.528) C8.1 ; C14.2 -71.691,-1.629 -71.491,-1.829 v2(-71.356,-1.829) ; Q3.2 Q3.2@-50.433,-9.519 ; v3@-50.433,-7.957 v3(-50.401,-7.925)
  Bottom Layer w0.6: Q3.2@-50.433,-9.519 v3@-50.433,-7.957
  other v2: -77.452,-2.591
Wake: C9.1 J10.5 R1.1 U1.3 | length 16.1
  Top Layer w0.2: J10.5@68.723,1.023 68.723,1 J10.5
  Bottom Layer w0.2: U1.3 57.978,-4.511 58.293,-4.826 61.341,-4.826 61.595,-4.572 R1.1 62.522,-3.137 62.665,-2.994 C9.1 64.443,-2.994 65.024,-2.413 65.024,-1.016 66.04,0 67.746,0 J10.5
pads on no net: J2.8 J3.8 J4.8 J5.8 U2.28

## Polygon pours and split planes (outlines as drawn)
NetC1_2 on Bottom Layer "NETC1_2_L02_P012" (solid, pour order 12): -42.037,-12.827 -42.037,-5.334 -41.427,-4.826 -33.274,-4.826 -32.512,-5.588 -32.512,-22.86 -33.147,-23.495 -43.307,-23.495 -44.196,-22.606 -44.196,-15.367
Pack+ on Bottom Layer "PACK+_L02_P001" (solid, pour order 1): -97.772,12.395 -97.772,1.854 -96.629,0.711 -84.691,0.711 -80.627,4.775 -78.341,4.775 -77.96,5.156 -77.96,6.045 -76.182,6.045 -74.404,7.823 -68.181,7.823 -67.673,8.331 -67.673,13.157 -68.326,13.843 -96.393,13.843
Pack_in+ on Bottom Layer "PACK_IN+_L02_P000" (solid, pour order 0): -72.88,-13.767 -72.88,-27.991 -72.499,-28.372 -45.562,-28.372 -45.085,-27.719 -45.085,-15.24 -46.558,-13.386 -72.499,-13.386
NetQ1_3 on Bottom Layer "NETQ1_3_L02_P003" (solid, pour order 3): -65.786,13.208 -65.786,2.286 -64.786,1.286 -62.974,1.286 -62.974,0.076 -60.942,-1.956 -28.499,-1.956 -27.432,-0.889 -27.432,12.954 -28.524,14.046 -64.948,14.046
BAT- on Bottom Layer "BAT-_L02_P020" (solid, pour order 20): -105.887,-36.513 cw(c-105.887,-21.273) -121.127,-21.273 -121.127,21.272 cw(c-105.887,21.272) -105.887,36.512 55.088,36.512 cw(c55.088,21.272) 70.328,21.272 70.328,-21.273 cw(c55.088,-21.273) 55.088,-36.513
Pack+ on Bottom Layer "PACK+_L02_P002" (solid, pour order 2): -107.95,-15.24 -104.14,-15.24 -103.505,-14.605 -103.505,-2.921 -99.949,0.635 -93.98,0.635 -93.345,1.27 -93.345,13.462 -93.726,13.843 -107.823,13.843 -108.585,13.081 -108.585,-14.605
NetC1_2 on Top Layer "NETC1_2_L01_P025" (solid, pour order 25): -42.037,-12.827 -42.037,-5.334 -41.427,-4.826 -33.274,-4.826 -32.512,-5.588 -32.512,-22.86 -33.147,-23.495 -43.307,-23.495 -44.196,-22.606 -44.196,-15.367
NetQ1_3 on Top Layer "NETQ1_3_L01_P024" (solid, pour order 24): -65.786,13.208 -65.786,2.286 -64.786,1.286 -62.974,1.286 -62.974,0.076 -60.942,-1.956 -28.499,-1.956 -27.432,-0.889 -27.432,12.954 -28.524,14.046 -64.948,14.046
Pack+ on Top Layer "PACK+_L01_P023" (solid, pour order 23): -97.772,12.395 -97.772,1.854 -96.629,0.711 -84.691,0.711 -80.627,4.775 -78.341,4.775 -77.96,5.156 -77.96,6.045 -76.182,6.045 -74.404,7.823 -68.181,7.823 -67.673,8.331 -67.673,13.157 -68.326,13.843 -96.393,13.843
Pack+ on Top Layer "PACK+_L01_P022" (solid, pour order 22): -107.95,-15.24 -104.14,-15.24 -103.505,-14.605 -103.505,-2.921 -99.949,0.635 -93.98,0.635 -93.345,1.27 -93.345,13.462 -93.726,13.843 -107.823,13.843 -108.585,13.081 -108.585,-14.605
Pack_in+ on Top Layer "PACK_IN+_L01_P019" (solid, pour order 19): -72.88,-13.767 -72.88,-27.991 -72.499,-28.372 -45.562,-28.372 -45.085,-27.719 -45.085,-15.24 -46.558,-13.386 -72.499,-13.386
VSS on Top Layer "VSS_L01_P026" (solid, pour order 26): -105.887,-36.513 cw(c-105.887,-21.273) -121.127,-21.273 -121.127,21.272 cw(c-105.887,21.272) -105.887,36.512 55.088,36.512 cw(c55.088,21.272) 70.328,21.272 70.328,-21.273 cw(c55.088,-21.273) 55.088,-36.513

## Silkscreen, mask and mechanical layers (free items; w line width, h text height)
Top Overlay:
  drawing of 30 lines, arcs and shapes, not listed
  text "Leak" at -106.934,30.988 h1 r90
  text "BATT -" at -60.579,29.337 h1.5
  text "PACK -" at -100.203,25.273 h1.5 r270
  text "Batt -" at 66.294,15.494 h0.5
  text "Pack+" at 62.642,15.384 h0.5
  text "Batt +" at 62.484,13.081 h0.5
  text "Wake" at 66.548,13.081 h0.5
  text "PACK +" at -100.203,11.938 h1.5 r270
  text "SDA" at 63.119,10.414 h0.5
  text "SCL" at 66.929,10.414 h0.5
  text "CAN_L" at 62.611,7.957 h0.5
  text "CAN_H" at 66.421,7.957 h0.5
  text "Pack +" at -106.045,1.143 h0.5 r270
  text "Detect" at -102.235,1.143 h0.5 r270
  text "Bat -" at -102.235,-2.667 h0.5 r270
  text "Battery Charge" at -87.043,-2.667 h1 r270
  text "Bat -" at -105.897,-2.822 h0.5 r270
  text "LCD Board Fuse" at 61.849,-5.969 h0.76 r270
  text "CAN_H" at -105.835,-6.604 h0.5 r270
  text "CAN_L" at -102.025,-6.604 h0.5 r270
  text "BATT +" at -52.197,-28.321 h1.5 r180
  text "Thermistor" at -95.885,-28.956 h1
  text "Leak" at -106.807,-34.29 h1 r90
Bottom Overlay:
  drawing of 5 lines, arcs and shapes, not listed
  text "Battery Fuse / If this is the problem... Godspeed / <3" at -38.608,-27.432 h0.76
Mechanical 1:
  circle w0.013: c0,0 r1.587
  circle w0.013: c-50.8,0 r1.587
  lines w0.013: -121.127,-21.273 ccw(c-105.887,-21.273) -105.887,-36.513 55.088,-36.513 ccw(c55.088,-21.273) 70.328,-21.273 70.328,21.272 ccw(c55.088,21.272) 55.088,36.512 -105.887,36.512 ccw(c-105.887,21.272) -121.127,21.272 -121.127,-21.273